# EAGLE board acs712_pattern (EAGLE 5.10)
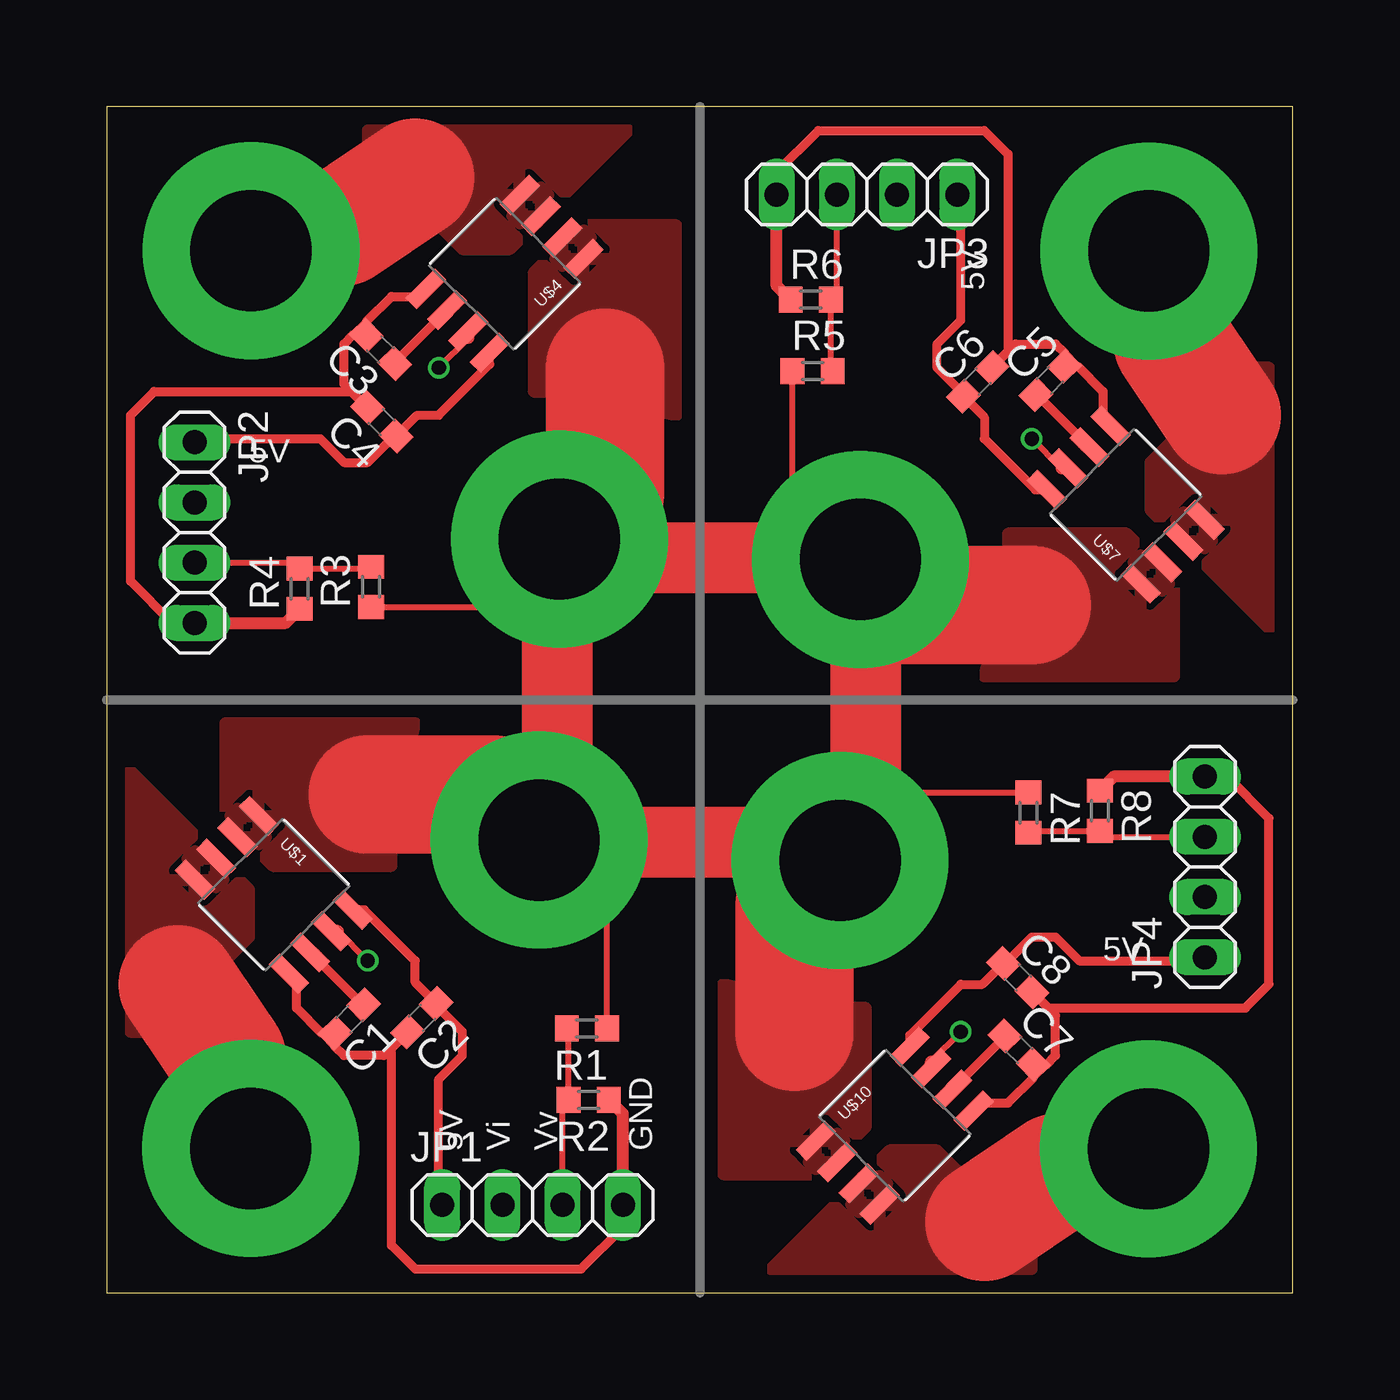
[diagram p0: board, top side]
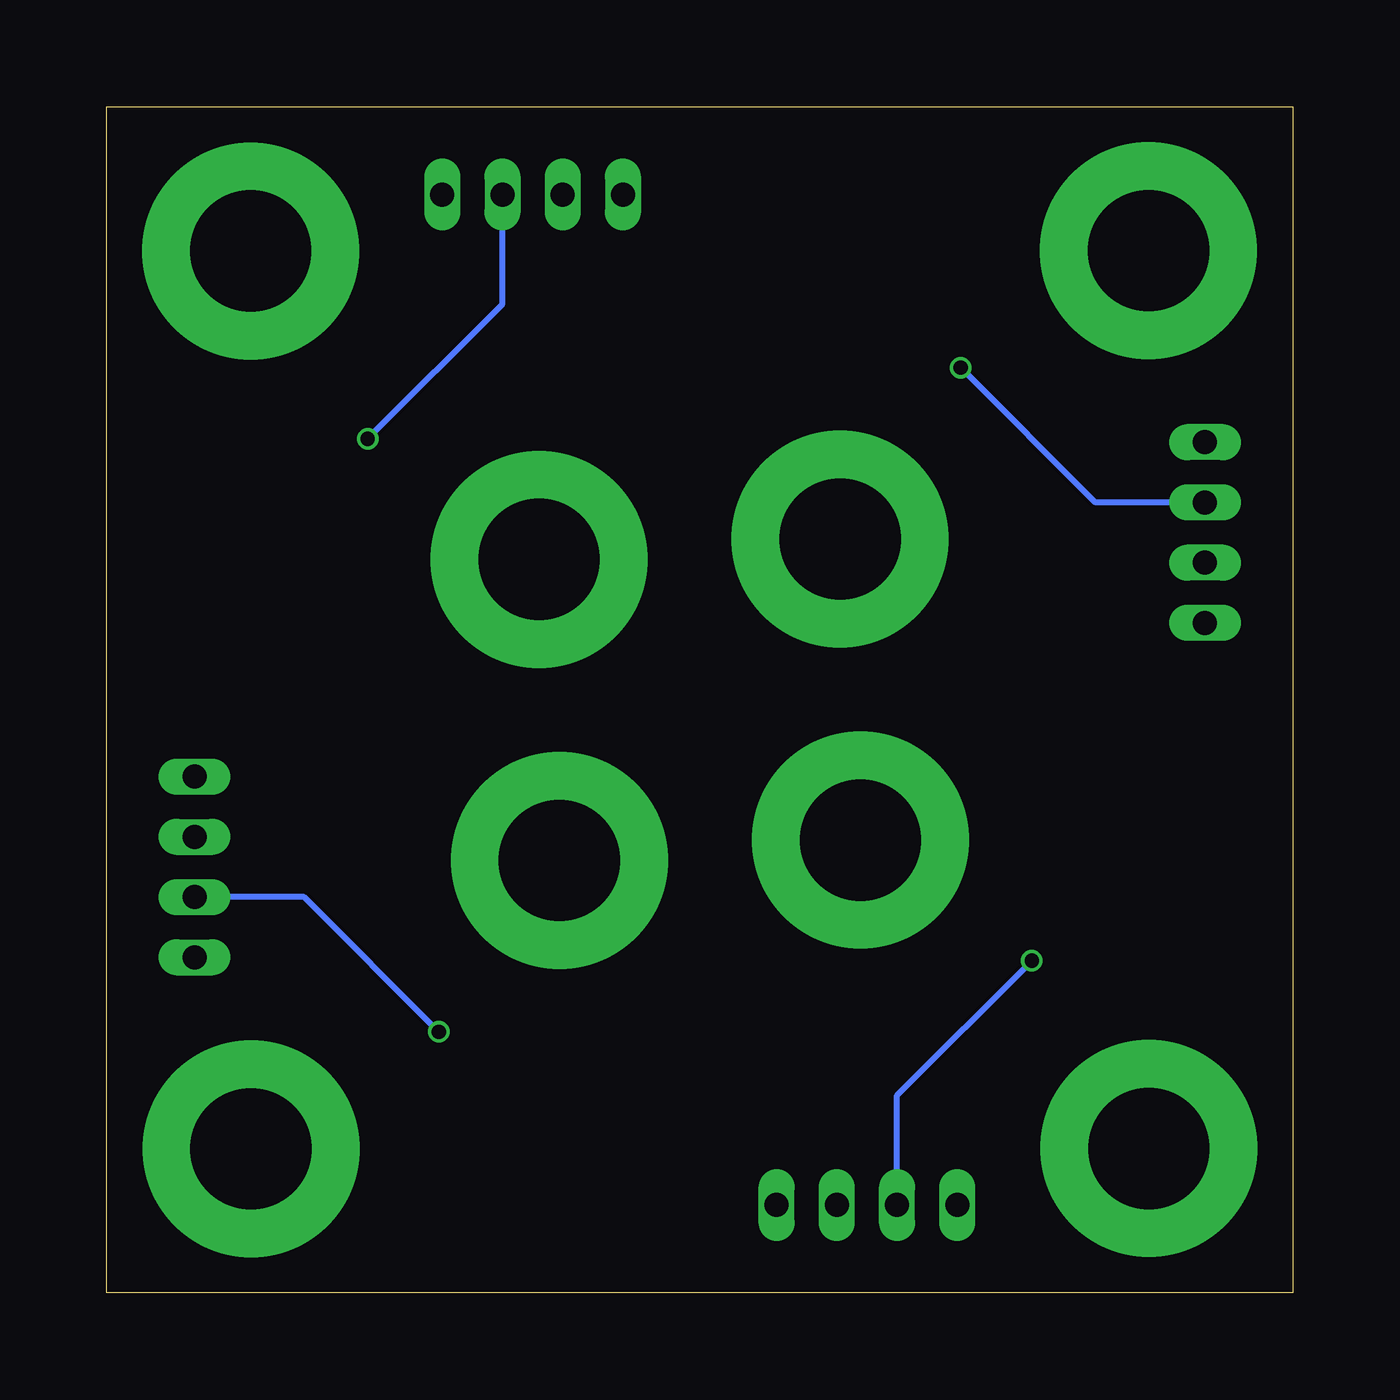
[diagram p1: board, bottom side, seen from below]

Size 50 x 50 mm. Coordinates in mm from the lower left corner, seen from the top.
Outline: 0,0 50,0 50,50 0,50 0,0
Copper layers (1*16): Top 0.035mm / dielectric 1.5mm / Bottom 0.035mm
Design rules "Fusion_eagle_rule_v1.1": minimum track width 6mil, minimum drill 12mil, track to track 6mil, track to pad 6mil, pad to pad 6mil, via to via 6mil, smd to smd 0mil, copper to edge 10mil, drill to drill 10mil, minimum pad ring 10mil, minimum via ring 6mil, stop-mask expansion 2mil, vias tented up to drill 100mil, thermal gap 10mil

## Footprints (pad centres in the part's own frame; a part is rotated, then mirrored left to right if it is on the bottom)
C0603 = smd 1.1 x 1: 1 -0.85,0; 2 0.85,0
1X04 = drill 1.016 long: 1 -3.81,0; 2 -1.27,0; 3 1.27,0; 4 3.81,0
R0603 = smd 1 x 1.1: 1 -0.85,0; 2 0.85,0
SOICC = smd 1.75 x 0.65: 1 -2.8,1.9; 2 -2.8,0.63; 3 -2.8,-0.64; 4 -2.8,-1.91; 5 2.8,-1.91; 6 2.8,-0.64; 7 2.8,0.63; 8 2.8,1.9
SCREW10 = drill 5.105 pad 9.144 round: 1 0,0

## Placement (x,y rotation side)
C1  1u  [C0603]  10.23,11.54 225 top
C2  .1u  [C0603]  13.29,11.6 225 top
C3  1u  [C0603]  11.54,39.77 135 top
C4  .1u  [C0603]  11.6,36.71 135 top
C5  1u  [C0603]  39.77,38.46 45 top
C6  .1u  [C0603]  36.71,38.4 45 top
C7  1u  [C0603]  38.46,10.23 315 top
C8  .1u  [C0603]  38.4,13.29 315 top
JP1  [1X04]  17.95,3.7 0 top
JP2  [1X04]  3.7,32.05 270 top
JP3  [1X04]  32.05,46.3 180 top
JP4  [1X04]  46.3,17.95 90 top
R1  300k .1%  [R0603]  20.24,11.14 180 top
R2  100k .1%  [R0603]  20.32,8.14 180 top
R3  300k .1%  [R0603]  11.14,29.76 90 top
R4  100k .1%  [R0603]  8.14,29.68 90 top
R5  300k .1%  [R0603]  29.76,38.86 0 top
R6  100k .1%  [R0603]  29.68,41.86 0 top
R7  300k .1%  [R0603]  38.86,20.24 270 top
R8  100k .1%  [R0603]  41.86,20.32 270 top
U$1  ACS712  [SOICC]  7.04,16.78 315 top
U$2  SCREW  [SCREW10]  18.22,19.08 0 top
U$3  SCREW  [SCREW10]  6.06,6.08 0 top
U$4  ACS712  [SOICC]  16.78,42.96 225 top
U$5  SCREW  [SCREW10]  19.08,31.78 270 top
U$6  SCREW  [SCREW10]  6.08,43.94 270 top
U$7  ACS712  [SOICC]  42.96,33.22 135 top
U$8  SCREW  [SCREW10]  31.78,30.92 180 top
U$9  SCREW  [SCREW10]  43.94,43.92 180 top
U$10  ACS712  [SOICC]  33.22,7.04 45 top
U$11  SCREW  [SCREW10]  30.92,18.22 90 top
U$12  SCREW  [SCREW10]  43.92,6.06 90 top

## Library data of the parts
C1-C8 R1-R8 = resistor
JP1-JP4 = pinhead
U$1-U$12 = lee

## Nets
GND: C1.2 C2.2 JP1.4 R2.1 U$1.5
GND1: C3.2 C4.2 JP2.4 R4.1 U$4.5
GND2: C5.2 C6.2 JP3.4 R6.1 U$7.5
GND3: C7.2 C8.2 JP4.4 R8.1 U$10.5
IP+: R1.1 U$1.1 U$1.2 U$2.1
IP+1: R3.1 U$4.1 U$4.2 U$5.1
IP+2: R5.1 U$7.1 U$7.2 U$8.1
IP+3: R7.1 U$10.1 U$10.2 U$11.1
IP-: U$1.3 U$1.4 U$3.1
IP-1: U$4.3 U$4.4 U$6.1
IP-2: U$7.3 U$7.4 U$9.1
IP-3: U$10.3 U$10.4 U$12.1
N$1: JP2.2 U$4.7
N$2: JP1.2 U$1.7
N$3: C3.1 U$4.6
N$4: JP2.3 R3.2 R4.2
N$5: JP3.2 U$7.7
N$6: C1.1 U$1.6
N$7: JP1.3 R1.2 R2.2
N$8: C5.1 U$7.6
N$9: JP3.3 R5.2 R6.2
N$10: JP4.2 U$10.7
N$11: C7.1 U$10.6
N$12: JP4.3 R7.2 R8.2
VCC: C2.1 JP1.1 U$1.8
VCC1: C4.1 JP2.1 U$4.8
VCC2: C6.1 JP3.1 U$7.8
VCC3: C8.1 JP4.1 U$10.8

## Tracks (layer width: path | path; a pad name or v marks a point on that pad's centre or on a via)
GND
  Top 0.381: U$1.5 8,13.12 8,12 9.06,10.94 C1.2 9.63,10.37 10,10 11.69,10 C2.2 12,10.31 12,2 13,1 20,1 21.76,2.76 JP1.4
  Top 0.5: R2.1 21.76,7.55 JP1.4
GND1
  Top 0.381: U$4.5 13.12,42 12,42 10.94,40.94 C3.2 10.37,40.37 10,40 10,38.31 C4.2 10.31,38 2,38 1,37 1,30 2.76,28.24 JP2.4
  Top 0.5: R4.1 7.55,28.24 JP2.4
GND2
  Top 0.381: U$7.5 42,36.88 42,38 40.94,39.06 C5.2 40.37,39.63 40,40 38.31,40 C6.2 38,39.69 38,48 37,49 30,49 28.24,47.24 JP3.4
  Top 0.5: R6.1 28.24,42.45 JP3.4
GND3
  Top 0.381: U$10.5 36.88,8 38,8 39.06,9.06 C7.2 39.63,9.63 40,10 40,11.69 C8.2 39.69,12 48,12 49,13 49,20 47.24,21.76 JP4.4
  Top 0.5: R8.1 42.45,21.76 JP4.4
IP+
  Top 0.254: R1.1 21.09,16.21 U$2.1
  Top 5: U$2.1 16.3,21 11,21
  pour Top: 13,24 5,24 5,20 7,18 12,18 12,20
IP+1
  Top 0.254: R3.1 16.21,28.91 U$5.1
  Top 5: U$5.1 21,33.7 21,39
  pour Top: 24,37 24,45 20,45 18,43 18,38 20,38
IP+2
  Top 0.254: R5.1 28.91,33.79 U$8.1
  Top 5: U$8.1 33.7,29 39,29
  pour Top: 37,26 45,26 45,30 43,32 38,32 38,30
IP+3
  Top 0.254: R7.1 33.79,21.09 U$11.1
  Top 5: U$11.1 29,16.3 29,11
  pour Top: 26,13 26,5 30,5 32,7 32,12 30,12
IP-
  Top 5: U$3.1 5.06,9.94 3,13
  pour Top (isolate 0.254): 4,19 1,22 1,11 2,11 6,15 6,17
IP-1
  Top 5: U$6.1 9.94,44.94 13,47
  pour Top (isolate 0.254): 19,46 22,49 11,49 11,48 15,44 17,44
IP-2
  Top 5: U$9.1 44.94,40.06 47,37
  pour Top (isolate 0.254): 46,31 49,28 49,39 48,39 44,35 44,33
IP-3
  Top 5: U$12.1 40.06,5.06 37,3
  pour Top (isolate 0.254): 31,4 28,1 39,1 39,2 35,6 33,6
N$1  (via drill 0.6)
  Top 0.254: v14,39 15.25,40.25
  Top 0.5: 15.25,40.25 U$4.7
  Bottom 0.254: v14,39 8.32,33.32 JP2.2
N$2  (via drill 0.6)
  Top 0.254: v11,14 9.75,15.25
  Top 0.5: 9.75,15.25 U$1.7
  Bottom 0.254: v11,14 16.68,8.32 JP1.2
N$3
  Top 0.381: C3.1 12.14,39.22 U$4.6
N$4
  Top 0.254: JP2.3 7.89,30.78 | R4.2 11.06,30.53
  Top 0.5: 7.89,30.78 arc-90 R4.2 | 11.06,30.53 arc90 R3.2
N$5  (via drill 0.6)
  Top 0.254: 40.25,34.75 v39,36
  Top 0.5: U$7.7 40.25,34.75
  Bottom 0.254: v39,36 33.32,41.68 JP3.2
N$6
  Top 0.381: C1.1 10.78,12.14 U$1.6
N$7
  Top 0.254: JP1.3 19.22,7.89 | R2.2 19.47,11.06
  Top 0.5: 19.22,7.89 arc-90 R2.2 | 19.47,11.06 arc90 R1.2
N$8
  Top 0.381: C5.1 39.22,37.86 U$7.6
N$9
  Top 0.254: 30.78,42.11 JP3.3 | 30.53,38.94 R6.2
  Top 0.5: R6.2 arc90 30.78,42.11 | R5.2 arc-90 30.53,38.94
N$10  (via drill 0.6)
  Top 0.254: 34.75,9.75 v36,11
  Top 0.5: U$10.7 34.75,9.75
  Bottom 0.254: v36,11 41.68,16.68 JP4.2
N$11
  Top 0.381: C7.1 37.86,10.78 U$10.6
N$12
  Top 0.254: 42.11,19.22 JP4.3 | 38.94,19.47 R8.2
  Top 0.5: R8.2 arc90 42.11,19.22 | R7.2 arc-90 38.94,19.47
S$1
  Top 3: 19,31 19,32 | 19,31 19,19 32,19 32,31 19,31
VCC
  Top 0.381: JP1.1 14,3.84 14,9 15,10 15,11 13.89,12.11 C2.1 13,13.09 13,14 10.86,16.14 U$1.8
VCC1
  Top 0.381: JP2.1 3.84,36 9,36 10,35 11,35 12.11,36.11 C4.1 13.09,37 14,37 16.14,39.14 U$4.8
VCC2
  Top 0.381: JP3.1 36,46.16 36,41 35,40 35,39 36.11,37.89 C6.1 37,36.91 37,36 39.14,33.86 U$7.8
VCC3
  Top 0.381: JP4.1 46.16,14 41,14 40,15 39,15 37.89,13.89 C8.1 36.91,13 36,13 33.86,10.86 U$10.8

## Text on the board
tPlace: 5V | 5V | 5V | 5V | Vi | Vv | GND